# Altium PCB XH-4A.pcbdoc
Units mm, origin at the board's own origin, x right, y up, seen from the top; angles counter-clockwise.
Board outline 25.32 x 18.56 mm, 2 copper layers (Top Layer, Bottom Layer), stack 0 mm thick; 1 components, 0 nets, 4 pads, 0 vias.
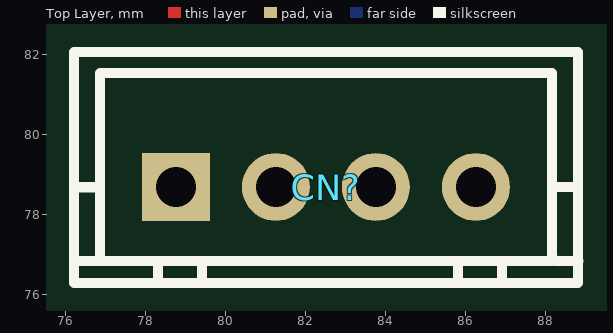
[diagram p0: Top Layer view]
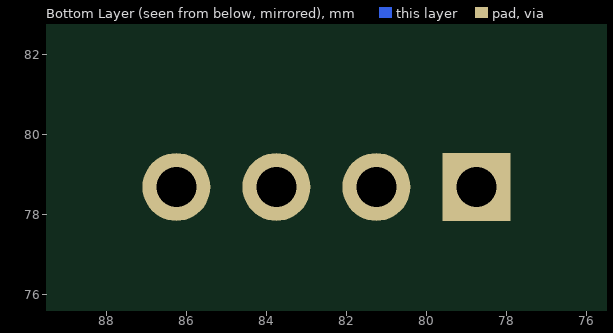
[diagram p1: Bottom Layer view, seen from below]

## Layer stack, top to bottom
Top Layer: signal copper (thickness not stored)
Bottom Layer: signal copper (thickness not stored)

## Board outline
95.171,69.85 69.85,69.85 69.85,88.41 95.171,88.41

## Components (designator, comment, footprint, x,y, rotation, side; value= is the part's Value field where it differs from the comment)
CN? "XH-4A" CONN-TH_4P-P2.50_XH-4A 82.509,78.682 r0 top

## Footprints (in the part's own frame and the unit in brackets; to place one, negate y for a bottom-side part, rotate by r counter-clockwise, add the part's x,y. Pads: shape width x height; smd on the part's side, far side on the other; paste and mask are expansions set on the pad)
CONN-TH_4P-P2.50_XH-4A [mm]
  rect 1.699x1.699 hole 1.001: 1(-3.749,0)
  round 1.699 hole 1.001: 2(-1.25,0) 3(1.25,0) 4(3.752,0)
  silkscreen extent -6.3,-2.4 6.31,3.38

## Nets (pads, with @x,y where several pads share a name; then routed paths per layer and width w, separated by ;. In a path a pad name is that pad's centre, name@x,y a point inside that pad or via, vN(x,y) a via of type N, cw(c..) or ccw(c..) an arc to the next point about the centre after c; other vN are vias at no path point)
pads on no net: CN?.1 CN?.2 CN?.3 CN?.4